# Altium PCB MainBoard.PcbDoc
Units mm, origin at the board's own origin, x right, y up, seen from the top; angles counter-clockwise.
Board outline 49.75 x 80.75 mm, 2 copper layers (Top Layer, Bottom Layer), stack 1.671 mm thick; 70 components, 68 nets, 339 pads, 67 vias.
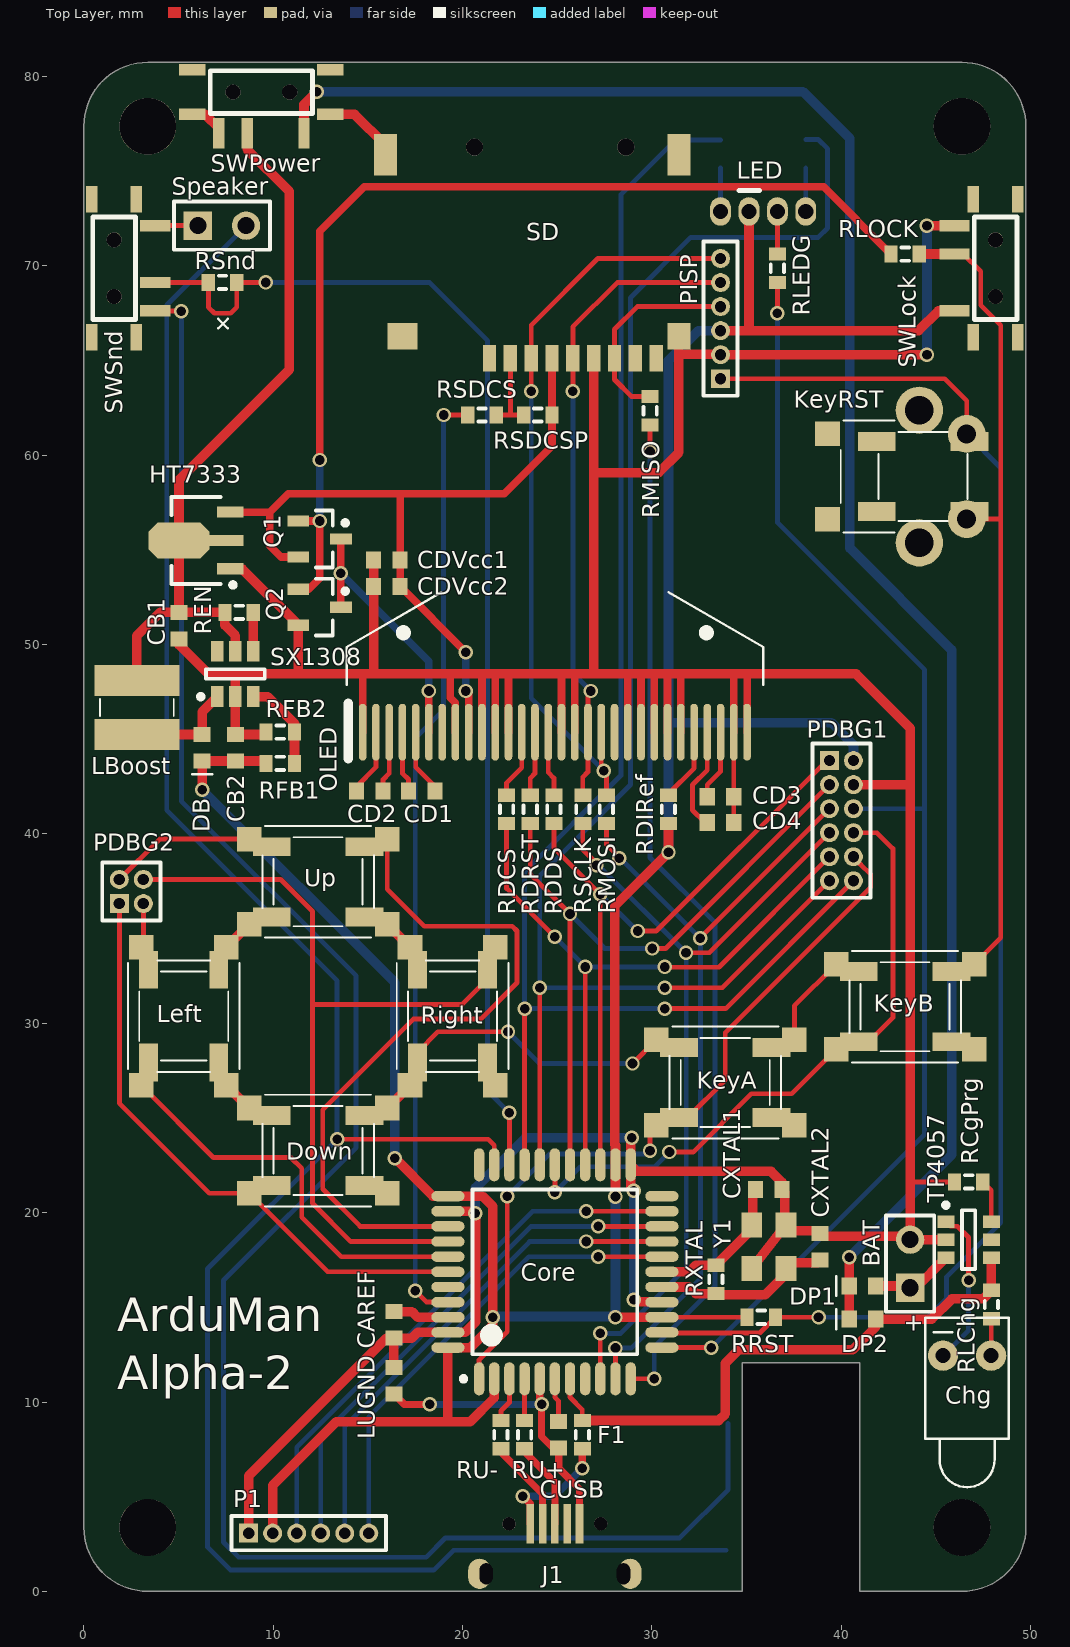
[diagram p0: Top Layer view]
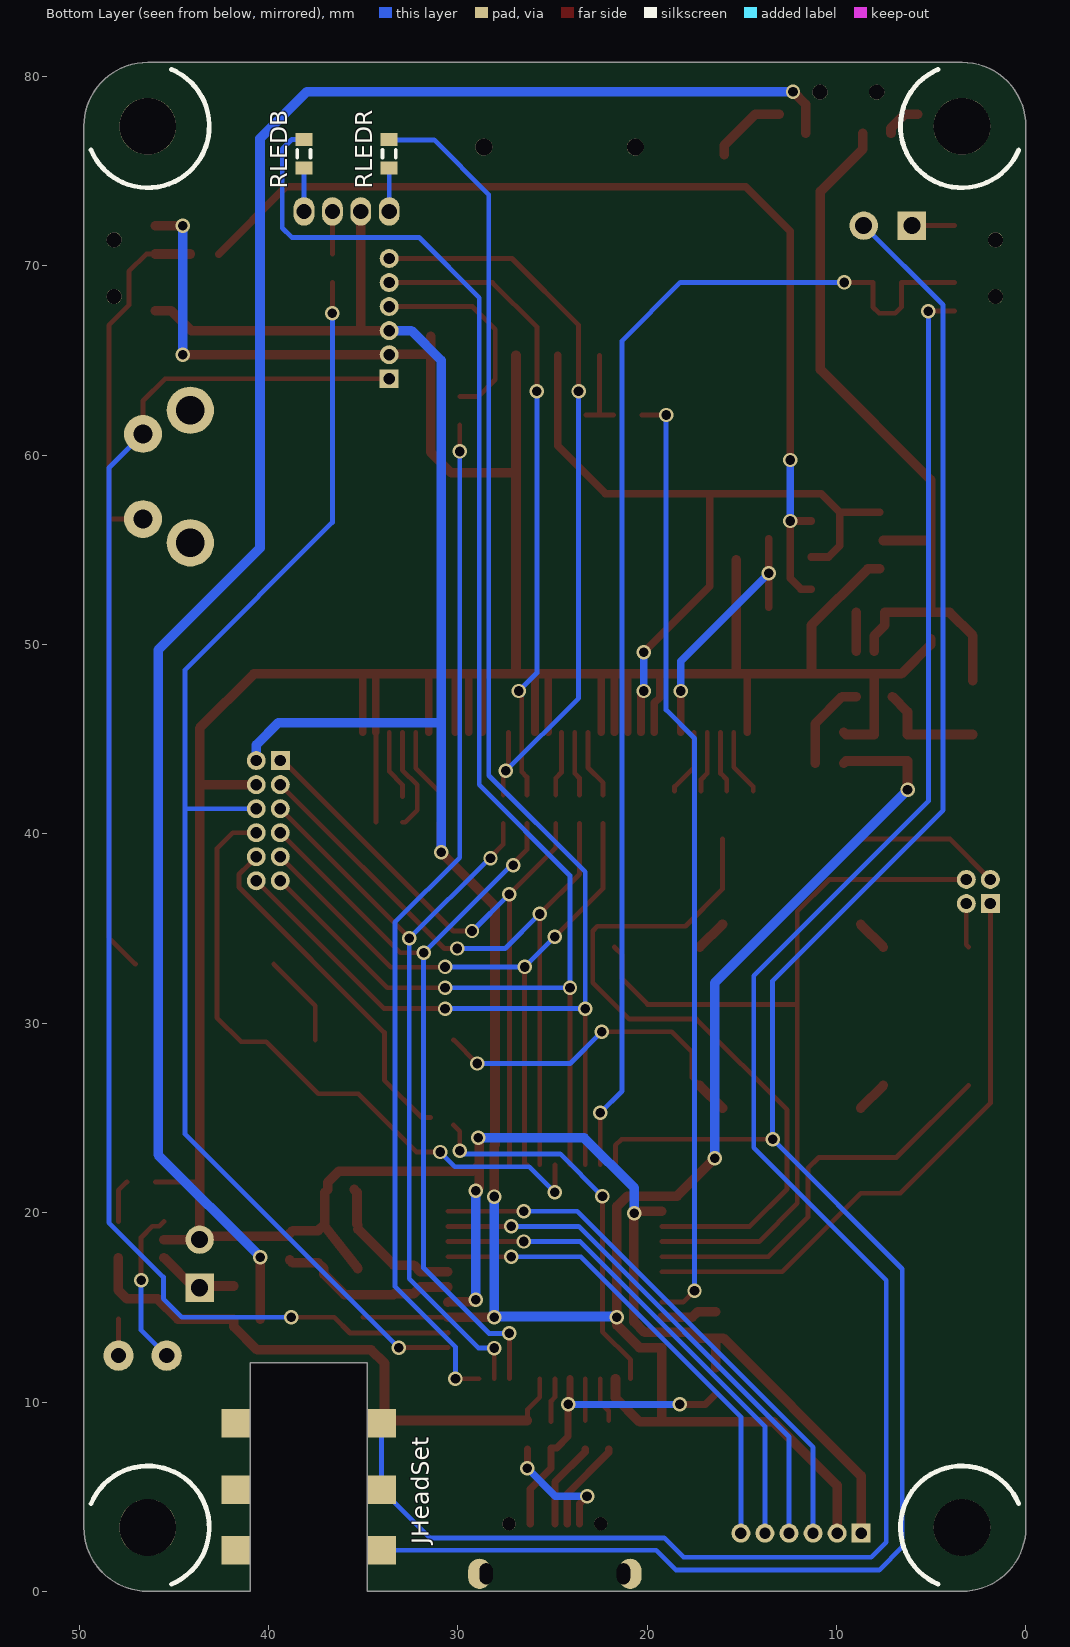
[diagram p1: Bottom Layer view, seen from below]

## Layer stack, top to bottom
Top Solder: solder mask 0.0102, Solder Resist, Dk 3.5
Top Layer: signal copper 0.0356
Dielectric 1: dielectric 1.6, FR-4, Dk 4.8
Bottom Layer: signal copper 0.0356
Bottom Solder: solder mask 0.0102, Solder Resist, Dk 3.5

## Board outline
0,3.375 0,77.375 cw(c3.375,77.375) 3.375,80.75 46.375,80.75 cw(c46.375,77.375) 49.75,77.375 49.75,3.375 cw(c46.375,3.375) 46.375,0 40.975,0 40.975,12.075 34.775,12.075 34.775,0 3.375,0 cw(c3.375,3.375)

## Design rules (kind name [scope] priority, off if disabled: settings)
Clearance [All] p1: gap=0.254 ignorepadtopadclearanceinfootprint=TRUE except(0: Arc-Hole Track-Hole SMDPad-THPad SMDPad-Hole THPad-Hole Via-Hole Fill-Hole Poly-Hole Region-Hole Text-Hole)
ComponentClearance [All] p1: gap=0 collisioncheckmode=3 verticalgap=0 showdistances=FALSE
HoleSize [All] p1: absolutevalues=TRUE maxlimit=10 minlimit=0.025 maxpercent=80.000 minpercent=20.000
PolygonConnect [All] p1: connectstyle=Relief reliefconductorwidth=0.254 reliefentries=4 polygonreliefangle="90 Angle" airgapwidth=0.254
RoutingVias [All] p1: holewidth=0.711 width=1.27 viastyle="Through Hole" minholewidth=0 minwidth=0.254 maxholewidth=10 maxwidth=10
SolderMaskExpansion [All] p1: expansion=0.102
UnRoutedNet [All] p1: checkbadconnections=TRUE
Width [All] p1: maxlimit=0.762 minlimit=0.254 preferedwidth=0.254
27 further rules are at their usual default settings.

## Components (designator, comment, footprint, x,y, rotation, side; value= is the part's Value field where it differs from the comment)
BAT "Battery" BAT-2 43.635,17.305 r90 top
CAREF "Cap Semi" 1608[0603] 16.375,14.075 r90 top value=100nF
CB1 "Cap Semi" 1608[0603] 5.025,51 r90 top value=10~47uF
CB2 "Cap Semi" 1608[0603] 8,44.55 r270 top value=4.7+uF
CD1 "Cap Semi" 1608[0603] 17.85,42.275 r180 top value=1uF
CD2 "Cap Semi" 1608[0603] 15.1,42.275 r180 top value=1uF
CD3 "Cap Semi" 1608[0603] 33.625,41.965 r180 top value=2.2uF
CD4 "Cap Semi" 1608[0603] 33.625,40.615 r180 top value=4.7uF
CDVcc1 "Cap Semi" 1608[0603] 16,54.475 r180 top value=1uF
CDVcc2 "Cap Semi" 1608[0603] 16,53.075 r180 top value=1uF
Chg "LED1" LED-1 46.645,12.45 r270 top locked
Core "ATmega32U4-AU" 44ML_N 24.875,16.875 r90 top locked
CUSB "Cap Semi" 1608[0603] 25.075,8.275 r270 top value=100pF
CXTAL1 "Cap Semi" 1608[0603] 36.175,21.225 r180 top value=22pF
CXTAL2 "Cap Semi" 1608[0603] 38.875,18.2 r270 top value=22pF
DB "Diode" D0603 6.25,44.55 r270 top
Down "MicroSwitch" Switch_changeable 12.375,23.275 r180 top locked
DP1 "Diode" D0603 41.125,16.125 r180 top
DP2 "Diode" D0603 41.125,14.375 r180 top
F1 "Fuse 0.5A" J1-0603 26.325,8.275 r90 top value=0.5A
HT7333 "HT7333" SOT89N 5.925,55.5 r180 top
J1 "USB" USBMICROF 24.875,3.575 r180 top
JHeadSet "Headset" PJ-313D-2 37.875,2.875 r90 bottom locked
KeyA "MicroSwitch" Switch_changeable 33.875,26.875 r180 top locked
KeyB "MicroSwitch" Switch_changeable 43.375,30.875 r180 top locked
KeyRST "MicroSwitch" MICROSWITCH-STAND 46.625,58.875 r90 top locked
LBoost "Inductor" CDRH3D16 2.8,46.675 r180 top value=47uH
LED "RGB LED" RGBLED 33.625,72.875 r0 top locked
Left "MicroSwitch" Switch_changeable 5.275,30.375 r90 top locked
LUGND "Inductor" 1608[0603] 16.375,11.125 r270 top value=31R
OLED "SSD1306" SSD1306 24.875,45.375 r0 top locked
P1 "MHDR1X6" MHDR1X6 8.7,3.075 r0 top
PDBG1 "MHDR2X6" MHDR2X6_NOMK 39.375,43.875 r270 top
PDBG2 "MHDR2X2" MHDR2X2_NOMK 1.875,36.325 r0 top
PISP "MHDR1X6" MHDR1X6 33.625,64.04 r90 top
Q1 "MOSFET-P" SOT23_N 12.45,55.575 r0 top
Q2 "MOSFET-N" SOT23_N 12.45,51.975 r0 top
RCgPrg "Res3" J1-0603 46.725,21.625 r180 top value=5K
RDCS "Res3" J1-0603 22.325,41.3 r90 top value=1K
RDDS "Res3" J1-0603 24.825,41.3 r90 top value=1K
RDIRef "Res3" J1-0603 30.875,41.3 r90 top value=800K
RDRST "Res3" J1-0603 23.575,41.3 r90 top value=1K
REN "Res3" J1-0603 8.2,51.7 r180 top value=100K
RFB1 "Res3" J1-0603 10.375,43.725 r180 top value=200K
RFB2 "Res3" J1-0603 10.375,45.375 r180 top value=27K
Right "MicroSwitch" Switch_changeable 19.475,30.375 r270 top locked
RLChg "Res3" J1-0603 47.925,15.15 r90 top value=620R
RLEDB "Res3" J1-0603 38.125,75.925 r90 bottom value=3.0K
RLEDG "Res3" J1-0603 36.625,69.875 r270 top value=3.25K
RLEDR "Res3" J1-0603 33.625,75.925 r90 bottom value=1.7K
RLOCK "Res3" J1-0603 43.375,70.625 r180 top value=1K
RMISO "Res3" J1-0603 29.9,62.35 r90 top value=1K
RMOSI "Res3" J1-0603 27.6,41.3 r90 top value=1K
RRST "Res3" J1-0603 35.775,14.475 r0 top value=100K
RSCLK "Res3" J1-0603 26.35,41.3 r90 top value=1K
RSDCS "Res3" J1-0603 21.025,62.125 r180 top value=1K
RSDCSP "Res3" J1-0603 23.975,62.125 r0 top value=100K
RSnd "Res3" J1-0603 7.325,69.125 r180 top value=?R
RU+ "Res3" J1-0603 23.275,8.275 r90 top value=22R
RU- "Res3" J1-0603 22.025,8.275 r90 top value=22R
RXTAL "Res3" J1-0603 33.375,16.475 r270 top value=1M
SD "HY-TF1007B" HY-TF1007B 30.225,66.575 r180 top locked
Speaker "Header 2" HDR1X2 6.025,72.125 r0 top
SWLock "MSK-1103_W13" MSK-1103_W13 48.15,69.875 r90 top locked
SWPower "MSK-1103_W13" MSK-1103_W13 9.375,79.175 r180 top locked
SWSnd "MSK-1103_W13" MSK-1103_W13 1.6,69.875 r270 top locked
SX1308 "SX1308" SOT23-6_N 8,48.45 r90 top
TP4057 "TP4057" SOT23-6_L 46.725,18.575 r0 top
Up "MicroSwitch" Switch_changeable 12.375,37.475 r0 top locked
Y1 "Quartz Oscillator" 3225QUARTZ_CRYSTAL 35.275,19.35 r270 top

## Footprints (in the part's own frame and the unit in brackets; to place one, negate y for a bottom-side part, rotate by r counter-clockwise, add the part's x,y. Pads: shape width x height; smd on the part's side, far side on the other; paste and mask are expansions set on the pad)
44ML_N [mm] "Thin QFP, 44-Leads, Body 10x10mm, Pitch 0.8mm, IPC Medium Density"
  oval 1.75x0.55 smd: 1(-5.65,4) 2(-5.65,3.2) 3(-5.65,2.4) 4(-5.65,1.6) 5(-5.65,0.8) 6(-5.65,0) 7(-5.65,-0.8) 8(-5.65,-1.6) 9(-5.65,-2.4) 10(-5.65,-3.2) 11(-5.65,-4) 23(5.65,-4) 24(5.65,-3.2) 25(5.65,-2.4) 26(5.65,-1.6) 27(5.65,-0.8) 28(5.65,0) 29(5.65,0.8) 30(5.65,1.6) 31(5.65,2.4) 32(5.65,3.2) 33(5.65,4)
  oval 0.55x1.75 smd: 12(-4,-5.65) 13(-3.2,-5.65) 14(-2.4,-5.65) 15(-1.6,-5.65) 16(-0.8,-5.65) 17(0,-5.65) 18(0.8,-5.65) 19(1.6,-5.65) 20(2.4,-5.65) 21(3.2,-5.65) 22(4,-5.65) 34(4,5.65) 35(3.2,5.65) 36(2.4,5.65) 37(1.6,5.65) 38(0.8,5.65) 39(0,5.65) 40(-0.8,5.65) 41(-1.6,5.65) 42(-2.4,5.65) 43(-3.2,5.65) 44(-4,5.65)
  silkscreen extent -5.77,-4.35 4.35,4.95, body extent -5,-5 5,5, height 1.2
1608[0603] [mm] "Chip Capacitor, Body 1.6x0.8mm, IPC High Density"
  rect 0.8x0.9 smd: 1(-0.7,0) 2(0.7,0)
  body extent -0.87,-0.48 0.87,0.48, height 1.3
3225QUARTZ_CRYSTAL [mm]
  rect 1.3x1.1 smd: 1(0,0) 2(2.3,0) 3(2.3,1.8) 4(0,1.8)
  body extent -0.45,-0.35 2.75,2.15, height 0.6
BAT-2 [mm] "Battery; 2 Leads"
  rect 1.5x1.5 hole 0.9: 1(-1.27,0)
  round 1.5 hole 0.9: 2(1.27,0)
  silkscreen extent -2.54,-1.27 2.54,1.27
CDRH3D16 [mm] "Inductor"
  rect 4.5x1.65 smd: 1(0,1.425) 2(0,-1.425)
  silkscreen extent -1.95,-0.45 1.95,0.45, body extent -2,-2 2,2, height 2
D0603 [mm] "Diode, Body 1.6x0.8mm"
  rect 0.8x0.9 smd: 1(-0.7,0) 2(0.7,0)
  silkscreen extent 1.4,-0.52 1.4,0.53, body extent -0.87,-0.48 0.87,0.48, height 1.3
HDR1X2 [mm] "Connector; Header; 2 Position"
  rect 1.5x1.5 hole 0.9: 1(0,0)
  round 1.5 hole 0.9: 2(2.54,0)
  silkscreen extent -1.27,-1.27 3.81,1.27
HY-TF1007B [mm] "Micro SD Card Slot"
  round 0.9 hole 0.9 unplated mask+0: 0(1.6,-9.7) 0(9.6,-9.7)
  rect 0.7x1.4 smd: 1(8.8,1.45) 2(7.7,1.45) 3(6.6,1.45) 4(5.5,1.45) 5(4.4,1.45) 6(3.3,1.45) 7(2.2,1.45) 8(1.1,1.45) 9(0,1.45)
  rect 1.2x1.4 smd: 10(-1.2,0.3)
  rect 1.2x2.2 smd: 10(-1.2,-9.3) 10(14.3,-9.3)
  rect 1.6x1.4 smd: 10(13.4,0.3)
  body extent -0.8,-16.3 13.9,1.3, height 1.85
J1-0603 [mm] "Chip Resistor, Body 1.6x0.8mm, IPC High Density"
  rect 0.7x0.9 smd: 1(-0.75,0) 2(0.75,0)
  silkscreen extent -0.2,-0.35 0.2,0.35, body extent -0.85,-0.48 0.85,0.48, height 0.9
LED-1 [mm] "LED; 2 Leads"
  round 1.6 hole 0.8: 1(0,1.27) 2(0,-1.27)
  silkscreen extent -2,-2.2 6.95,2.2
MHDR1X6 [mm] "Connector; Header; 6 Position"
  rect 1x1 hole 0.6: 1(0,0)
  round 1 hole 0.6: 2(1.27,0) 3(2.54,0) 4(3.81,0) 5(5.08,0) 6(6.35,0)
  silkscreen extent -0.9,-0.9 7.25,0.9
MHDR2X2_NOMK [mm] "Connector; Header; 2x2 Position"
  rect 1x1 hole 0.6: 1(0,0)
  round 1 hole 0.6: 2(0,1.27) 3(1.27,0) 4(1.27,1.27)
  silkscreen extent -0.9,-0.9 2.17,2.17
MHDR2X6_NOMK [mm] "Connector; Header; 6x2 Position"
  rect 1x1 hole 0.6: 1(0,0)
  round 1 hole 0.6: 2(0,1.27) 3(1.27,0) 4(1.27,1.27) 5(2.54,0) 6(2.54,1.27) 7(3.81,0) 8(3.81,1.27) 9(5.08,0) 10(5.08,1.27) 11(6.35,0) 12(6.35,1.27)
  silkscreen extent -0.9,-0.9 7.25,2.17
MICROSWITCH-STAND [mm] "Micro Switch, Standing"
  round 2.5 hole 1.5: 0(-3.5,2.5) 0(3.5,2.5)
  rect 1.3x1.3 smd: 1(-2.25,7.35) 2(2.25,7.35)
  round 2 hole 1: 1(-2.25,0) 2(2.25,0)
  rect 1x2 smd: 1(-1.85,4.75) 1(-1.85,-0.15) 2(1.85,4.75) 2(1.85,-0.15)
  silkscreen extent -2.95,-0.05 2.95,6.65, body extent -4.25,-5 4.25,4.45, height 7
MSK-1103_W13 [mm] "Switch"
  round 0.8 hole 0.8 unplated mask+0: 0(-1.5,0) 0(1.5,0)
  rect 0.6x1.6 smd: 1(-2.25,2.175) 2(0.75,2.175) 3(2.25,2.175)
  rect 1.4x0.6 smd: 4(-3.65,-1.175) 4(-3.65,1.175) 4(3.65,-1.175) 4(3.65,1.175)
  silkscreen extent -2.7,-1.12 2.7,1.12, body extent -3.9,-3.88 3.9,2.37, height 1.4
PJ-313D-2 [mm] "Headphone Jack"
  rect 1.5x1.5 smd: 1(6,-3.85) 1(6,3.85) 2(2.5,-3.85) 2(2.5,3.85) 3(-0.7,-3.85) 3(-0.7,3.85)
  body extent -5,-4.2 9,4.2, height 0.7
RGBLED [mm] "RGB LED"
  oval 1.1x1.5 hole 0.8: 1(0,0) 2(1.5,0) 3(3,0) 4(4.5,0)
  silkscreen extent 0.97,1.1 2.05,1.1
SOT23-6_L [mm] "SOT23, 6-Leads, Body 2.9x1.6mm, Pitch 0.95mm, Lead Span 2.7mm, IPC High Density"
  rect 0.9x0.65 smd: 1(-1.2,0.95) 2(-1.2,0) 3(-1.2,-0.95) 4(1.2,-0.95) 5(1.2,0) 6(1.2,0.95)
  silkscreen extent -1.32,-1.55 0.35,1.95, body extent -0.9,-1.55 0.9,1.55, height 1.45
SOT23-6_N [mm] "SOT23, 6-Leads, Body 2.9x1.6mm, Pitch 0.95mm, Lead Span 2.7mm, IPC Medium Density"
  rect 1.1x0.65 smd: 1(-1.2,0.95) 2(-1.2,0) 3(-1.2,-0.95) 4(1.2,-0.95) 5(1.2,0) 6(1.2,0.95)
  silkscreen extent -1.32,-1.55 0.25,1.95, body extent -0.9,-1.55 0.9,1.55, height 1.45
SOT23_N [mm] "SOT23, 3-Leads, Body 2.9x1.3mm, Pitch 0.95mm, Lead Span 2.3mm - Reverse Pinning, IPC Medium Density"
  rect 1.15x0.6 smd: 1(1.125,0) 2(-1.125,-0.95) 3(-1.125,0.95)
  silkscreen extent -0.2,-1.5 1.48,1.5, body extent -0.7,-1.5 0.7,1.5, height 1.1
SOT89N [mm] "SOT89, 3-Leads, Body 4.5x2.4 mm, Pitch 1.5mm, Lead Span 4.1mm, IPC Medium Density"
  rect 1.4x0.6 smd: 1(-1.8,1.5) 3(-1.8,-1.5)
  rect 1.8x0.6 smd: 2(-1.6,0)
  oct 3.2x1.9 smd: 2(0.9,0)
  silkscreen extent -2.07,-2.3 1.3,2.47, body extent -1.3,-2.3 1.3,2.3, height 1.6
SSD1306 [mm] "OLED Controller"
  oval 0.4x3 smd: 1(-10.15,0) 2(-9.45,0) 3(-8.75,0) 4(-8.05,0) 5(-7.35,0) 6(-6.65,0) 7(-5.95,0) 8(-5.25,0) 9(-4.55,0) 10(-3.85,0) 11(-3.15,0) 12(-2.45,0) 13(-1.75,0) 14(-1.05,0) 15(-0.35,0) 16(0.35,0) 17(1.05,0) 18(1.75,0) 19(2.45,0) 20(3.15,0) 21(3.85,0) 22(4.55,0) 23(5.25,0) 24(5.95,0) 25(6.65,0) 26(7.35,0) 27(8.05,0) 28(8.75,0) 29(9.45,0) 30(10.15,0)
  silkscreen extent -11,-1.4 11,7.39
Switch_changeable [mm]
  rect 1.3x1.3 smd: 1(-3.65,2.25) 1(3.65,2.25) 2(-3.65,-2.25) 2(3.65,-2.25)
  rect 2x1 smd: 1(-2.45,1.85) 1(2.45,1.85) 2(-2.45,-1.85) 2(2.45,-1.85)
  silkscreen extent -2.95,-2.95 2.95,2.95
USBMICROF [mm] "USB Micro Slot Female"
  rrect100% 1.2x1.6 hole 0.7 slot 1.1 at 90 deg copper offset -0.35,0: 0(-3.625,2.65)
  round 0.7 hole 0.7 mask+0: 0(-2.425,0) 0(2.425,0)
  rrect100% 1.2x1.6 hole 0.7 slot 1.1 at 90 deg copper offset 0.35,0: 0(3.625,2.65)
  rect 0.4x2.1 smd: 1(1.3,0) 2(0.65,0) 3(0,0) 4(-0.65,0) 5(-1.3,0)
  body extent -3.8,-0.26 3.8,4.8, height 2.6

## Part data
CAREF CB1 CB2 CD1 CD2 CD3 CD4 CDVcc1 CDVcc2 CUSB CXTAL1 CXTAL2: "Capacitor (Semiconductor SIM Model)", LatestRevisionDate=29-May-2009, LatestRevisionNote="IPC-7351 Footprint Added.", PackageDescription="Chip Capacitor", PackageReference=C1206, Published=8-Jun-2000, Publisher="Altium Limited"
Chg: "Typical RED GaAs LED", LatestRevisionDate=08-Jul-2005, LatestRevisionNote="Mech Layer 1 removed.", PackageDescription="LED; 2 Leads", PackageReference=LED-1, Published=8-Jun-2000, Publisher="Altium Limited"
Core: "8-bit AVR Microcontroller, 2.7-5.5V, 32KB Flash, 2.5KB EEPROM, 1KB SRAM, USB Controller, 44-pin TQFP, Industrial Grade (-40癈 to 85癈)", Supplier Part Number 1=ATMEGA32U4-AU-ND, ComponentLink1Description="Manufacturer Link", ComponentLink1URL=http://www.atmel.com/products/avr/default.asp?, ComponentLink2Description="ATmega16U4/32U4 Datasheet", ComponentLink2URL=http://www.atmel.com/dyn/resources/prod_documents/doc7766.pdf, ComponentLink3Description="ATmega16U4 ATmega32U4 Summary", ComponentLink3URL=http://www.atmel.com/dyn/resources/prod_documents/7766S.pdf, ComponentLink4Description="Atmel.com Home", ComponentLink4URL=http://www.atmel.com, DatasheetVersion="revD, Jan-2009", PackageDescription="44-Pin Plastic Thin Quad Flat Pack, 10 x 10 x 1.0 mm Body, 0.8 mm Pitch (TQFP)", PackageReference=44ML, PackageVersion="rev.G, Jul-2007", Published=1-Apr-2010, Publisher="Altium Limited", Supplier 1=Digi-Key, Supplier 2=Farnell, Supplier 3=Mouser, Supplier Part Number 2=1748525, Supplier Part Number 3=556-ATMEGA32U4-AU
DB DP1 DP2: "Default Diode", Code_JEDEC=DO-214-AB, LatestRevisionDate=17-Jul-2002, LatestRevisionNote="Re-released for DXP Platform.", PackageDescription="DO-214-AB/SMC; 2 C-Bend Leads; Body 7.9 x 5.9 mm, inc. leads (LxW)", PackageReference=SMC, PackageVersion=Sep-1996, Published=8-Jun-2000, Publisher="Altium Limited"
Down KeyA KeyB KeyRST Left Right Up: "Micro Switch"
F1: library part Res3, "Fuse", LatestRevisionDate=29-May-2009, LatestRevisionNote="IPC-7351 Footprint Added.", PackageDescription="Chip Resistor", PackageReference=J1-0603, Published=8-Jun-2000, Publisher="Altium Limited"
HT7333: "3.3v LDO Regulator"
J1: library part USBMicroF, "USB Micro Female Jack"
JHeadSet: library part PJ-313D, "3.5mm Headset Jack"
LED: library part RGBLED
OLED: "OLED Controller"
P1 PISP: "Header, 6-Pin", LatestRevisionDate=17-Jul-2002, LatestRevisionNote="Re-released for DXP Platform.", Publisher="Altium Limited"
PDBG1: "Header, 6-Pin, Dual row", LatestRevisionDate=17-Jul-2002, LatestRevisionNote="Re-released for DXP Platform.", Publisher="Altium Limited"
PDBG2: "Header, 2-Pin, Dual row", LatestRevisionDate=17-Jul-2002, LatestRevisionNote="Re-released for DXP Platform.", Publisher="Altium Limited"
Q1: "P-Channel MOSFET", LatestRevisionDate=17-Jul-2002, LatestRevisionNote="Re-released for DXP Platform.", PackageDescription="TO, Flat Index; 3 In-Line, Axial Leads; Body Dia. 4.6mm; Lead Dia. 0.5 mm (max)", PackageReference=E3, PackageVersion=1995/1996, Published=8-Jun-2000, Publisher="Altium Limited"
Q2: "N-Channel MOSFET", LatestRevisionDate=17-Jul-2002, LatestRevisionNote="Re-released for DXP Platform.", PackageDescription="TO, Flat Index; 3 In-Line, Axial Leads; Body Dia. 4.6mm; Lead Dia. 0.5 mm (max)", PackageReference=E3, PackageVersion=1995/1996, Published=8-Jun-2000, Publisher="Altium Limited"
RCgPrg RDCS RDDS RDIRef RDRST REN RFB1 RFB2 RLChg RLEDB RLEDG RLEDR RLOCK RMISO RMOSI RRST RSCLK RSDCS RSDCSP RSnd RU+ RU- RXTAL: "Resistor", LatestRevisionDate=29-May-2009, LatestRevisionNote="IPC-7351 Footprint Added.", PackageDescription="Chip Resistor", PackageReference=J1-0603, Published=8-Jun-2000, Publisher="Altium Limited"
SD: "Micro SD Card Slot"
Speaker: "Header, 2-Pin", LatestRevisionDate=17-Jul-2002, LatestRevisionNote="Re-released for DXP Platform.", Publisher="Altium Limited"
SWLock SWPower SWSnd: "Switch"
SX1308: "Boost DC-DC"
Y1: library part OSC3225
LBoost LUGND: Code_IEC=1005, Code_JEITA=0402, LatestRevisionDate=29-May-2009, LatestRevisionNote="IPC-7351 Footprint Added.", PackageDescription="Chip Inductor", PackageReference=0402-A, Published=8-Jun-2000, Publisher="Altium Limited"

## Free pads (board coordinates)
  round 3 hole 3 unplated mask+0: 0(3.375,3.375) 0(3.375,77.375) 0(46.375,3.375) 0(46.375,77.375)

## Via types
v1: diameter 0.762, hole 0.508, Top Layer to Bottom Layer, tented both sides, 67 vias

## Nets (pads, with @x,y where several pads share a name; then routed paths per layer and width w, separated by ;. In a path a pad name is that pad's centre, name@x,y a point inside that pad or via, vN(x,y) a via of type N, cw(c..) or ccw(c..) an arc to the next point about the centre after c; other vN are vias at no path point)
Bat+: BAT.1 DP1.1 TP4057.3 | length 4.4
  Top Layer w0.508: DP1.1 43.545,16.125 BAT.1 43.935,16.035 TP4057.3
DPad-Down: Core.39 Down.1 PDBG2.1 | length 31.6
  Top Layer w0.254: PDBG2.1 1.875,25.775 6.625,21.025 8.725,21.025 12.875,16.875 Core.39
DPad-Left: Core.38 Left.1 PDBG2.3 | length 23.8
  Top Layer w0.254: Left.1@3.025,26.725 6.837,22.913 10.937,22.913 11.508,22.342 11.508,19.763 13.596,17.675 Core.38 ; Left.1@3.025,34.025 3.145,34.145 PDBG2.3
DPad-Right: Core.37 PDBG2.4 Right.1 | length 44.7
  Top Layer w0.254: PDBG2.4 10.39,37.595 12.075,35.91 12.075,31 ; Core.37 14.092,18.475 12.075,20.492 12.075,31 ; Right.1@21.725,34.025 21.325,33.625 21.325,32.825 21.325,32.35 19.975,31 12.075,31
DPad-Up: Core.36 PDBG2.2 Up.1 | length 45.5
  Top Layer w0.254: PDBG2.2 4.005,39.725 Up.1@8.725,39.725 ; Up.1@16.025,39.725 16.025,37.075 17.975,35.125 22.625,35.125 22.875,34.875 22.875,32.15 20.95,30.225 17.4,30.225 12.613,25.438 12.613,21.249 14.587,19.275 Core.36
GND: BAT.2 CAREF.1 CB1.1 CB2.1 CD3.1 CD4.1 CDVcc1.2 CDVcc2.2 Core.15 Core.23 Core.35 Core.43 CXTAL1.1 CXTAL2.1 HT7333.1 LUGND.1 OLED.1 OLED.8 OLED.10 OLED.11 OLED.12 OLED.16 OLED.17 OLED.21 OLED.22 OLED.23 OLED.24 OLED.25 OLED.29 OLED.30 P1.1 PDBG1.4 PISP.2 Q2.2 RCgPrg.2 RFB2.2 SD.6 SD.10 SWLock.3 SWPower.3 SWPower.4 SX1308.2 TP4057.2 Y1.2 Y1.4 | length 265.1
  Top Layer w0.254: CD4.1 CD3.1 OLED.29 ; 43.635,21.625 RCgPrg.2
  Top Layer w0.4: OLED.1 14.725,48.45 ; 19.34,48.45 19.34,47.204 19.625,46.919 OLED.8 ; OLED.10 21.025,48.45 ; OLED.11 21.725,48.45 ; OLED.12 22.425,48.45 ; OLED.16 25.225,48.45 ; OLED.17 25.925,48.45 ; OLED.21 28.725,48.45 ; OLED.22 29.425,48.45 ; OLED.23 30.125,48.45 ; OLED.24 30.825,48.45 ; OLED.25 31.525,48.45 ; OLED.29 34.325,48.45 ; OLED.30 35.025,48.45
  Top Layer w0.508: CB1.1 5.025,50 6.575,48.45 8,48.45 ; SWPower.4@5.725,78 6.4,78 7.125,77.275 SWPower.3 ; HT7333.1 8.35,54 Q2.2 11.325,48.45 ; P1.1 8.7,6.1 15.975,13.375 CAREF.1 17.325,13.375 17.625,13.675 Core.43 20.132,13.675 20.7,14.243 20.7,19.95 v1(20.675,19.975) 20.575,20.075 Core.35 ; RFB2.2 9.5,45.25 CB2.1 SX1308.2 8,48.45 ; SWPower.4@13.025,78 14.3,78 15.925,76.375 SD.10@15.925,75.875 ; CDVcc1.2 CDVcc2.2 15.3,48.45 ; LUGND.1 CAREF.1 ; SD.6@26.925,65.275 26.925,59.075 ; v1(28.926,23.951) 28.875,23.9 Core.23 ; v1(29.05,15.4) 29.158,15.292 30.508,15.292 Core.15 ; v1(29.05,21.15) 28.875,21.325 Core.23 ; SD.10@31.425,66.275 31.425,65.325 ; Y1.2 Y1.4 ; PDBG1.4 43.635,42.605 ; v1(44.525,65.31) PISP.2 33.61,65.325 31.425,65.325 ; v1(44.525,72.115) 45.965,72.115 SWLock.3 ; TP4057.2 BAT.2 ; 8,48.45 11.325,48.45 ; 11.325,48.45 14.725,48.45 15.3,48.45 ; 15.3,48.45 19.34,48.45 21.025,48.45 21.725,48.45 22.425,48.45 25.225,48.45 25.925,48.45 26.925,48.45 ; 26.925,48.45 28.725,48.45 29.425,48.45 30.125,48.45 30.825,48.45 31.525,48.45 34.325,48.45 35.025,48.45 40.775,48.45 43.635,45.59 43.635,42.605 ; 26.925,48.45 26.925,59.075 ; 26.925,59.075 30.35,59.075 31.425,60.15 31.425,65.325 ; Core.23 29.217,22.183 36.292,22.183 36.875,21.6 CXTAL1.1 37.025,21.075 37.025,19.4 Y1.4 ; Y1.4 37.375,19.05 38.725,19.05 CXTAL2.1 39.025,18.75 43.46,18.75 BAT.2 ; BAT.2 43.635,21.625 43.635,42.605
  Bottom Layer w0.508: v1(20.675,19.975) 20.675,21.3 23.326,23.951 v1(28.926,23.951) ; v1(29.05,15.4) v1(29.05,21.15) ; v1(44.525,65.31) v1(44.525,72.115)
GND-LOCK: Down.2 KeyA.2 KeyB.2 KeyRST.1 Left.2 Right.2 RLOCK.1 SWLock.2 Up.2 | length 70.9
  Top Layer w0.254: Right.2@17.225,26.725 17.625,27.125 17.625,27.925 17.625,28.475 18.7,29.55 v1(22.4,29.55) ; v1(28.975,27.875) KeyA.2@30.225,29.125 ; KeyA.2@37.525,29.125 37.525,30.925 KeyB.2@39.725,33.125 ; SWLock.2 46.45,70.625 47.369,69.706 47.369,67.921 48.425,66.865 48.425,56.625 ; KeyRST.1@46.625,56.625 48.425,56.625 ; KeyB.2@47.025,33.125 48.425,34.525 48.425,56.625
  Top Layer w0.508: Left.2@7.525,26.725 Down.2@8.725,25.525 ; Left.2@7.525,34.025 Up.2@8.725,35.225 ; Down.2@16.025,25.525 17.225,26.725 Right.2@17.25,26.7 ; Up.2@16.025,35.225 Right.2@17.225,34.025 ; RLOCK.1 SWLock.2
  Bottom Layer w0.254: v1(22.4,29.55) 24.075,27.875 v1(28.975,27.875)
Key-A: Core.1 KeyA.1 PDBG1.10 | length 39.2
  Top Layer w0.254: Core.1 20.875,12.225 22.362,13.712 v1(22.362,20.865) ; v1(29.9,23.275) 29.9,24.3 KeyA.1@30.225,24.625 ; KeyA.1@31.425,25.025 31.9,25.025 33.875,27 33.875,29.509 41.556,37.19 41.556,37.86 41.01,38.406 40.983,38.406 40.645,38.744 PDBG1.10
  Bottom Layer w0.254: v1(22.362,20.865) 24.597,23.1 v1@29.725,23.1 ; v1(29.9,23.275) v1@29.725,23.1 ; v1@30.025,23.1 v1@29.725,23.1
Key-B: Core.28 KeyB.1 PDBG1.8 | length 34.5
  Top Layer w0.254: v1(24.875,21.075) Core.28 ; v1(30.927,23.201) 32.176,23.201 35.25,26.275 37.375,26.275 39.725,28.625 40.125,29.025 40.925,29.025 41.446,29.025 42.725,30.304 42.725,39.225 41.885,40.065 PDBG1.8
  Bottom Layer w0.254: v1(24.875,21.075) 26.225,22.425 30.15,22.425 v1(30.927,23.201)
LED-Blue: Core.29 PDBG1.11 RLEDB.2 | length 82.9
  Top Layer w0.254: Core.29 v1(24.075,31.875) ; v1(30.675,31.875) 33.725,31.875 PDBG1.11
  Bottom Layer w0.254: v1(30.675,31.875) v1(24.075,31.875) 24.075,37.8 28.87,42.595 28.87,68.32 32.05,71.5 38.775,71.5 39.275,72 39.275,76.175 38.775,76.675 RLEDB.2
LED-Green: Core.12 PDBG1.6 RLEDG.2 | length 70.5
  Top Layer w0.254: Core.12 v1(33.125,12.875) ; v1(36.625,67.5) RLEDG.2
  Bottom Layer w0.254: v1(33.125,12.875) 44.4,24.15 44.4,41.335 ; v1(36.625,67.5) 36.625,56.45 44.4,48.675 44.4,41.335 ; PDBG1.6 44.4,41.335
LED-Red: Core.30 PDBG1.12 RLEDR.2 | length 79.9
  Top Layer w0.254: Core.30 v1@23.275,30.75 ; v1(30.675,30.775) 33.895,30.775 PDBG1.12
  Bottom Layer w0.254: v1(30.675,30.775) v1(23.275,30.775) 23.275,38 28.362,43.087 28.362,73.762 31.25,76.65 RLEDR.2@33.625,76.65
MISO: Core.11 RMISO.1 | length 54.4
  Top Layer w0.254: Core.11 v1(30.125,11.225) ; v1(29.9,60.2) RMISO.1
  Bottom Layer w0.254: v1(29.9,60.2) 29.9,38.75 33.324,35.326 33.324,16.106 30.125,12.907 v1(30.125,11.225)
MISO_R: PISP.4 RMISO.2 SD.7 | length 11
  Top Layer w0.254: RMISO.2 28.925,63.1 28.025,64 28.025,65.275 28.025,66.65 29.225,67.85 PISP.4
MOSI: Core.10 PDBG1.5 RMOSI.1 | length 43.4
  Top Layer w0.254: RMOSI.1 27.6,39.45 28.275,38.775 v1(28.275,38.725) ; Core.10 v1(28.075,12.85) ; v1(32.562,34.488) 32.562,34.522 PDBG1.5
  Bottom Layer w0.254: v1(28.075,12.85) 28.9,12.85 32.562,16.512 v1(32.562,34.488) 28.325,38.725 v1(28.275,38.725)
MOSI_R: OLED.19 PISP.6 RMOSI.2 SD.3 | length 40
  Top Layer w0.254: v1(23.625,63.375) 23.625,65.275 23.625,66.875 27.14,70.39 PISP.6 ; OLED.19 27.325,43.475 v1(27.462,43.338) 27.6,43.2 RMOSI.2
  Bottom Layer w0.254: v1(23.625,63.375) 23.625,47.175 v1(27.462,43.338)
NetCAREF_2: CAREF.2 Core.42 | length 3
  Top Layer w0.508: CAREF.2 17.325,14.775 17.625,14.475 Core.42
NetCD1_1: CD1.1 OLED.5 | length 3.5
  Top Layer w0.254: OLED.5 17.525,43.525 18.55,42.5 CD1.1
NetCD1_2: CD1.2 OLED.4 | length 3.2
  Top Layer w0.254: OLED.4 16.825,43.2 17.15,42.875 CD1.2
NetCD2_1: CD2.1 OLED.3 | length 3.2
  Top Layer w0.254: CD2.1 15.8,42.875 16.125,43.2 OLED.3
NetCD2_2: CD2.2 OLED.2 | length 3.5
  Top Layer w0.254: CD2.2 14.4,42.5 15.425,43.525 OLED.2
NetCD3_2: CD3.2 OLED.28 | length 3.7
  Top Layer w0.254: CD3.2 32.925,42.6 33.625,43.3 OLED.28
NetCD4_2: CD4.2 OLED.27 | length 5.5
  Top Layer w0.254: CD4.2 32.785,40.615 32.144,41.256 32.144,42.594 32.925,43.375 OLED.27
NetChg_1: Chg.1 RLChg.1 | length 2
  Top Layer w0.254: Chg.1 47.925,12.46 RLChg.1
NetChg_2: Chg.2 TP4057.1 | length 8.3
  Top Layer w0.254: TP4057.1 45.769,19.281 46.133,19.281 46.725,18.689 v1(46.725,16.425)
  Bottom Layer w0.254: Chg.2 46.725,13.8 v1(46.725,16.425)
NetCore_16: Core.16 CXTAL2.2 RXTAL.2 Y1.3 | length 9.5
  Top Layer w0.508: Core.16 31.975,16.075 32.325,15.725 RXTAL.2 33.375,15.667 35.992,15.667 37.075,16.75 Y1.3 37.375,17.35 38.725,17.35 CXTAL2.2
NetCore_17: Core.17 CXTAL1.2 RXTAL.1 Y1.1 | length 7.6
  Top Layer w0.508: Core.17 31.975,16.875 32.325,17.225 RXTAL.1 Y1.1@35.275,19.125 ; Y1.1 35.325,19.4 35.325,21.075 CXTAL1.2
NetDB_1: DB.1 LBoost.1 SX1308.1 | length 5.8
  Top Layer w0.508: LBoost.1 DB.1 6.25,46.45 SX1308.1
NetDP1_2: DP1.2 DP2.2 SWPower.1 | length 98.5
  Top Layer w0.508: SWPower.1 11.625,78.525 v1(12.3,79.2) ; DP2.2 DP1.2 v1(40.425,17.65)
  Bottom Layer w0.508: v1(12.3,79.2) 37.975,79.2 40.45,76.725 40.45,55.1 45.825,49.725 45.825,23.05 v1(40.425,17.65)
NetF1_1: F1.1 J1.1 | length 6.4
  Top Layer w0.381: v1(23.175,5.025) 23.575,4.625 J1.1 ; v1(26.325,6.5) F1.1
  Bottom Layer w0.381: v1(23.175,5.025) 24.85,5.025 v1(26.325,6.5)
NetJ1_2: J1.2 RU-.1 | length 4.9
  Top Layer w0.381: RU-.1 22.025,7.346 24.225,5.146 J1.2
NetJ1_3: J1.3 RU+.1 | length 4.6
  Top Layer w0.381: RU+.1 23.275,7.375 24.875,5.775 J1.3
NetJHeadSet_1: JHeadSet.1 JHeadSet.2 SWSnd.3 | length 105.1
  Top Layer w0.254: SWSnd.3 5.125,67.625 v1(5.15,67.6)
  Bottom Layer w0.254: v1(5.15,67.6) 5.15,41.725 14.375,32.5 14.375,23.425 7.375,16.425 7.375,2.6 8.175,1.8 18.075,1.8 19.1,2.825 31.475,2.825 34.025,5.375 JHeadSet.1@34.025,8.875
NetLED_1: LED.1 RLEDR.1 | length 2.3
  Bottom Layer w0.254: LED.1 RLEDR.1
NetLED_3: LED.3 RLEDG.1 | length 2.2
  Top Layer w0.254: RLEDG.1 LED.3
NetLED_4: LED.4 RLEDB.1 | length 2.3
  Bottom Layer w0.254: LED.4 RLEDB.1
NetOLED_13: OLED.13 RDCS.2 | length 3.7
  Top Layer w0.254: RDCS.2 22.325,42.7 23.125,43.5 OLED.13
NetOLED_14: OLED.14 RDRST.2 | length 3.4
  Top Layer w0.254: RDRST.2 23.575,42.95 23.825,43.2 OLED.14
NetOLED_15: OLED.15 RDDS.2 | length 3.4
  Top Layer w0.254: OLED.15 24.525,43.25 24.825,42.95 RDDS.2
NetOLED_26: OLED.26 RDIRef.2 | length 3.9
  Top Layer w0.254: RDIRef.2 30.875,42.125 32.225,43.475 OLED.26
NetQ1_2: Q1.3 Q2.3 RLOCK.2 | length 53.4
  Top Layer w0.4: Q2.3 11.875,52.925 12.45,53.5 v1(12.45,56.525) Q1.3 ; v1(12.45,59.75) 12.45,71.825 14.8,74.175 39.075,74.175 RLOCK.2
  Bottom Layer w0.4: v1(12.45,56.525) v1(12.45,59.75)
NetRCgPrg_1: RCgPrg.1 TP4057.6 | length 2.3
  Top Layer w0.254: RCgPrg.1 47.925,21.175 TP4057.6
NetREN_1: REN.1 SX1308.4 | length 2
  Top Layer w0.508: SX1308.4 REN.1
NetRFB1_1: RFB1.1 RFB2.1 SX1308.3 | length 4.9
  Top Layer w0.508: SX1308.3 9.7,47.25 11.125,45.825 RFB2.1 RFB1.1
NetRSDCS_1: RSDCS.1 RSDCSP.1 SD.2 | length 4.6
  Top Layer w0.254: RSDCS.1 22.525,62.125 ; SD.2@22.525,65.275 22.525,62.125 ; RSDCSP.1 22.525,62.125
NetSpeaker_1: Speaker.1 SWSnd.1 | length 2.2
  Top Layer w0.254: SWSnd.1 Speaker.1
OLED-CS: Core.26 PDBG1.9 RDCS.1 | length 35.2
  Top Layer w0.254: RDCS.1 22.325,37.125 v1(24.875,34.575) ; Core.26@26.331,22.525 Core.26 v1(26.475,32.975) ; v1(30.675,32.975) 30.687,32.963 33.543,32.963 PDBG1.9
  Bottom Layer w0.254: v1(24.875,34.575) v1(26.475,32.975) v1(30.675,32.975)
OLED-DS: Core.25 PDBG1.1 RDDS.1 | length 35.7
  Top Layer w0.254: RDDS.1 24.825,39.275 v1(27.275,36.825) Core.25 ; v1(29.25,34.875) 29.35,34.875 30.232,34.875 39.232,43.875 PDBG1.1
  Bottom Layer w0.254: v1(27.275,36.825) 29.225,34.875 v1(29.25,34.875)
OLED-POWER: OLED.6 Q1.1 Q2.1 | length 13.9
  Top Layer w0.4: Q2.1 v1(13.575,53.775) Q1.1 ; OLED.6 v1(18.225,47.55)
  Bottom Layer w0.4: v1(13.575,53.775) 18.225,49.125 v1(18.225,47.55)
OLED-RST: Core.27 PDBG1.3 RDRST.1 | length 36.9
  Top Layer w0.254: RDRST.1 23.575,37.875 v1(25.675,35.775) Core.27 ; v1(30.025,33.95) 30.72,33.95 PDBG1.3
  Bottom Layer w0.254: v1(25.675,35.775) 27.5,33.95 v1(30.025,33.95)
RST: Core.13 KeyRST.2 PISP.1 RRST.2 | length 78.6
  Top Layer w0.254: Core.13 30.525,13.644 35.694,13.644 RRST.2 v1(38.8,14.475) ; PISP.1 45.46,64.04 46.625,62.875 KeyRST.2@46.625,61.125
  Bottom Layer w0.254: v1(38.8,14.475) 44.575,14.475 45.55,15.45 45.55,16.6 48.425,19.475 48.425,59.325 KeyRST.2@46.625,61.125
SCLK: Core.9 PDBG1.7 RSCLK.1 | length 44.4
  Top Layer w0.254: RSCLK.1 26.35,39.175 27.075,38.45 v1(27.075,38.35) ; Core.9 v1(27.275,13.625) ; v1@31.8,33.7 v1(31.8,33.725) 33.035,33.725 PDBG1.7
  Bottom Layer w0.254: v1(27.075,38.35) 27.175,38.35 v1(31.8,33.725) 31.812,33.713 31.812,17.084 28.353,13.625 v1(27.275,13.625)
SCLK_R: OLED.18 PISP.5 RSCLK.2 SD.5 | length 34.3
  Top Layer w0.254: v1(25.825,63.375) SD.5 25.825,66.775 28.17,69.12 PISP.5 ; RSCLK.2 26.35,43 26.625,43.275 OLED.18 26.625,47.4 v1(26.775,47.55)
  Bottom Layer w0.254: v1(25.825,63.375) 25.825,48.5 v1(26.775,47.55) 26.775,47.525 v1@26.6,47.35
SD-CS: Core.41 RSDCS.2 | length 50.1
  Top Layer w0.254: v1(17.5,15.875) 18.1,15.275 Core.41 ; v1(19,62.125) RSDCS.2
  Bottom Layer w0.254: v1(17.5,15.875) 17.5,45.05 19,46.55 v1(19,62.125)
Serial-RX: Core.20 P1.4 | length 27.7
  Top Layer w0.254: v1(27.175,19.275) Core.20
  Bottom Layer w0.254: P1.4 12.51,8.167 23.618,19.275 v1(27.175,19.275)
Serial-TX: Core.21 P1.3 | length 29
  Top Layer w0.254: v1(26.525,20.075) Core.21
  Bottom Layer w0.254: P1.3 11.24,7.615 23.7,20.075 v1(26.525,20.075)
Speaker-1: Core.31 RSnd.1 RSnd.2 SWSnd.2 | length 65.7
  Top Layer w0.254: SWSnd.2 RSnd.2 6.575,67.825 6.9,67.5 7.75,67.5 8.075,67.825 RSnd.1 v1(9.6,69.125) ; Core.31 v1(22.475,25.275)
  Bottom Layer w0.254: v1(9.6,69.125) 18.25,69.125 21.325,66.05 21.325,26.425 v1(22.475,25.275)
Speaker-2: Core.32 JHeadSet.3 Speaker.2 | length 115.9
  Top Layer w0.254: v1(13.375,23.875) 21.35,23.875 21.675,23.55 Core.32
  Bottom Layer w0.254: Speaker.2 4.375,67.935 4.375,41.25 13.375,32.25 v1(13.375,23.875) 6.525,17.025 6.525,2.35 7.75,1.125 18.475,1.125 19.525,2.175 JHeadSet.3@33.925,2.175
TWI-SCL: Core.18 P1.6 | length 25.1
  Top Layer w0.254: v1(27.175,17.675) Core.18
  Bottom Layer w0.254: P1.6 15.05,9.225 23.5,17.675 v1(27.175,17.675)
TWI-SDA: Core.19 P1.5 | length 26.4
  Top Layer w0.254: v1(26.525,18.475) Core.19
  Bottom Layer w0.254: P1.5 13.78,8.718 23.537,18.475 v1(26.525,18.475)
UCap: Core.6 CUSB.1 | length 2.3
  Top Layer w0.254: Core.6 24.875,10.25 25.075,10.05 CUSB.1
UD+: Core.4 RU+.2 | length 2.2
  Top Layer w0.254: RU+.2 Core.4
UD-: Core.3 RU-.2 | length 2.4
  Top Layer w0.254: RU-.2 22.025,9.525 22.475,9.975 Core.3
UGND: Core.5 CUSB.2 J1.5 LUGND.2 | length 16.7
  Top Layer w0.381: LUGND.2 16.925,9.875 v1(18.275,9.875) ; Core.5 24.075,9.975 v1(24.175,9.875) 24.175,8.175 24.775,7.575 CUSB.2 25.075,6.5 26.175,5.4 J1.5
  Bottom Layer w0.381: v1(18.275,9.875) v1(24.175,9.875)
UVBus: Core.7 DP2.1 F1.2 RLChg.2 TP4057.4 | length 30.4
  Top Layer w0.254: Core.7 25.675,10.25 26.325,9.6 F1.2
  Top Layer w0.508: F1.2 33.525,9.025 33.875,9.375 33.875,12.05 34.575,12.75 40.6,12.75 41.825,13.975 DP2.1 44.775,14.375 45.85,15.45 47.475,15.45 RLChg.2 TP4057.4
VBat: CB1.2 HT7333.2 LBoost.2 REN.2 SWPower.2 SX1308.5 | length 40.9
  Top Layer w0.508: LBoost.2 2.8,50.475 4.025,51.7 CB1.2 ; HT7333.2@5.025,55.5 HT7333.2@7.525,55.5 ; SX1308.5 8,50.475 7.45,51.025 REN.2 CB1.2 ; SWPower.2 8.625,76.15 10.85,73.925 10.85,64.525 5.025,58.7 CB1.2
VCC: CB2.2 Core.2 Core.14 Core.24 Core.34 Core.44 DB.2 LED.2 P1.2 PDBG1.2 PISP.3 RDIRef.1 RFB1.2 RRST.1 SWLock.1 | length 165.1
  Top Layer w0.254: Core.14 RRST.1
  Top Layer w0.508: v1(6.25,42.325) DB.2 CB2.2 9.5,43.85 RFB1.2 ; P1.2 9.97,5.595 13.325,8.95 19.225,8.95 ; v1(16.425,22.875) 18.425,20.875 Core.34 21.05,20.875 21.6,20.325 v1(21.6,14.475) 21.6,14.065 20.41,12.875 Core.44 19.225,8.95 ; Core.2 21.675,10.225 20.4,8.95 19.225,8.95 ; v1(28.075,14.475) Core.14 ; v1(28.075,20.85) Core.24 28.075,23.545 28.037,23.583 28.037,36.187 v1(30.875,39.025) ; v1@30.875,39.275 RDIRef.1 ; PISP.3 35.125,66.58 ; LED.2 35.125,66.58 ; SWLock.1 45.125,67.625 44.08,66.58 35.125,66.58
  Bottom Layer w0.508: v1(6.25,42.325) 16.425,32.15 v1(16.425,22.875) ; v1(21.6,14.475) 21.639,14.514 28.036,14.514 v1(28.075,14.475) v1(28.075,20.85) ; v1(30.875,39.025) 30.875,45.875 ; PISP.3 32.455,66.58 30.875,65 30.875,45.875 ; PDBG1.2 40.645,44.705 39.475,45.875 30.875,45.875
VCC_3V: CDVcc1.1 CDVcc2.1 HT7333.3 OLED.9 Q1.2 RSDCSP.2 SD.4 | length 40.8
  Top Layer w0.4: HT7333.3 9.825,57 ; Q1.2 10.425,54.625 9.825,55.225 9.825,57 ; v1(20.175,47.55) 20.325,47.4 OLED.9 ; v1(20.175,49.6) CDVcc2.1 CDVcc1.1 16.7,57.975 ; SD.4@24.725,65.275 RSDCSP.2 24.725,60.5 22.2,57.975 16.7,57.975 ; 9.825,57 10.8,57.975 16.7,57.975
  Bottom Layer w0.4: v1(20.175,47.55) v1(20.175,49.6)
pads on no net: Core.8 Core.22 Core.33 Core.40 J1.0 J1.4 KeyRST.0 OLED.7 OLED.20 SD.0 SD.1 SD.8 SD.9 SWLock.0 SWLock.4 SWPower.0 SWSnd.0 SWSnd.4 SX1308.6 TP4057.5

## Polygon pours and split planes (outlines as drawn)
no net on Top Layer "Top Layer-No Net 2" (solid, pour order 6): -0.125,3.375
no net on Top Layer "Top Layer-No Net 1" (solid, pour order 4): -0.125,3.375

## Silkscreen, mask and mechanical layers (free items; w line width, h text height)
Top Overlay:
  lines w0.127: 7.1,66.7 7.6,67.2 ; 7.1,67.2 7.6,66.7 ; 44.885,13.675 45.86,13.675
  text "ArduMan / Alpha-2" at 1.775,10.1 h3.05
Bottom Overlay:
  lines w0.254: 0.375,4.625 cw(c3.375,3.375) 4.625,0.375 ; 0.375,76.125 ccw(c3.375,77.375) 4.625,80.375 ; 45.125,0.375 cw(c46.375,3.375) 49.375,4.625 ; 45.125,80.375 ccw(c46.375,77.375) 49.375,76.125
Border:
  the board outline again, w0.1

## Text inside footprints (layer, text, board x,y; h text height)
BAT: Top Overlay "+" at 44.212,13.635 h0.9 r90